# Altium PCB TUD-LoggingPCB.pcbdoc
Units mm, origin at the board's own origin, x right, y up, seen from the top; angles counter-clockwise.
Board outline 101.02 x 43.95 mm, 2 copper layers (Top Layer, Bottom Layer); 71 components, 65 nets, 401 pads, 135 vias.
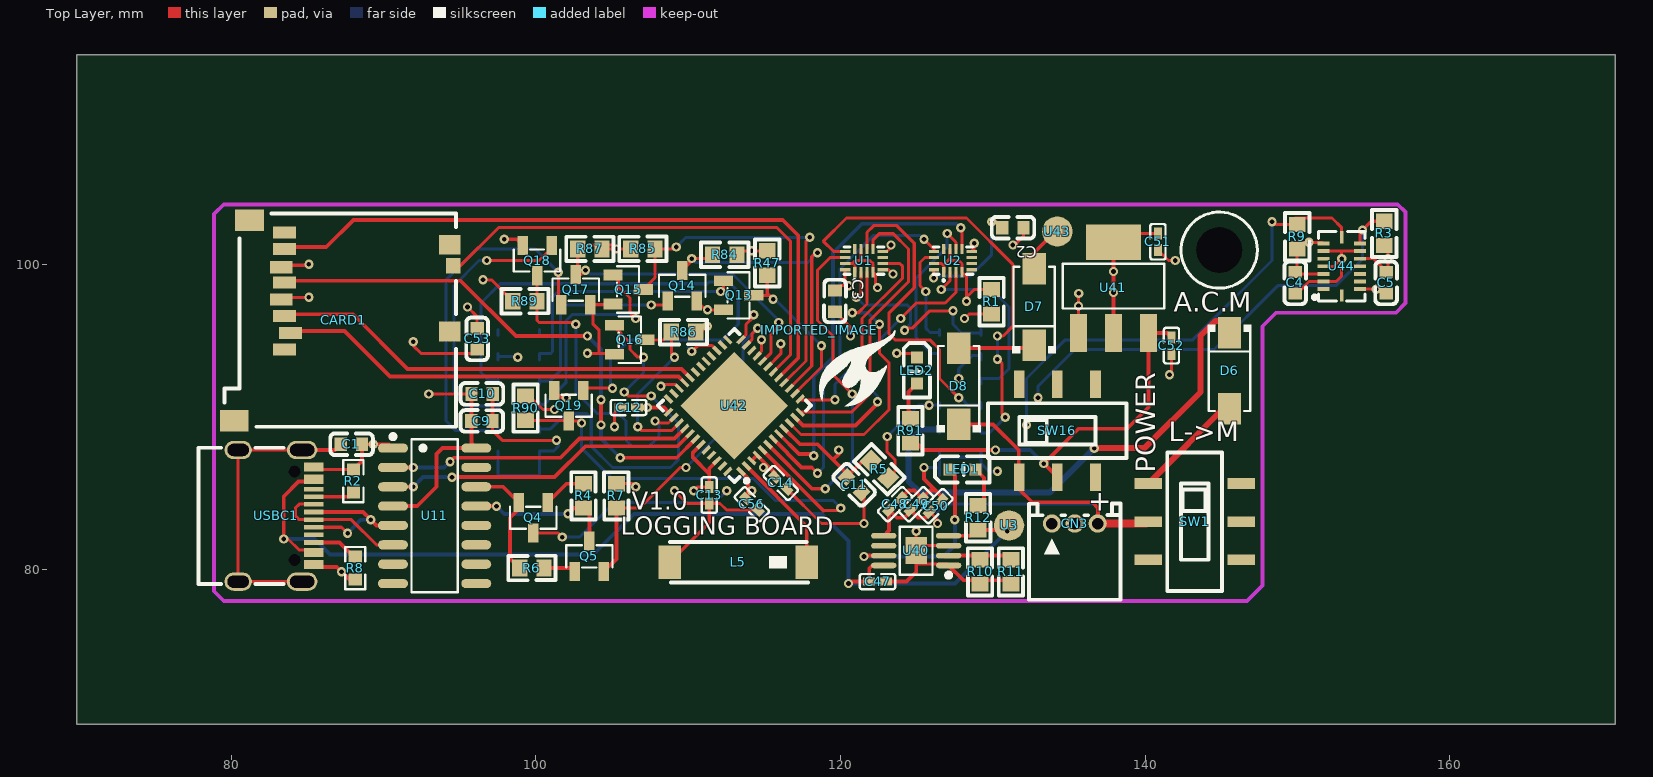
[diagram p0: Top Layer view]
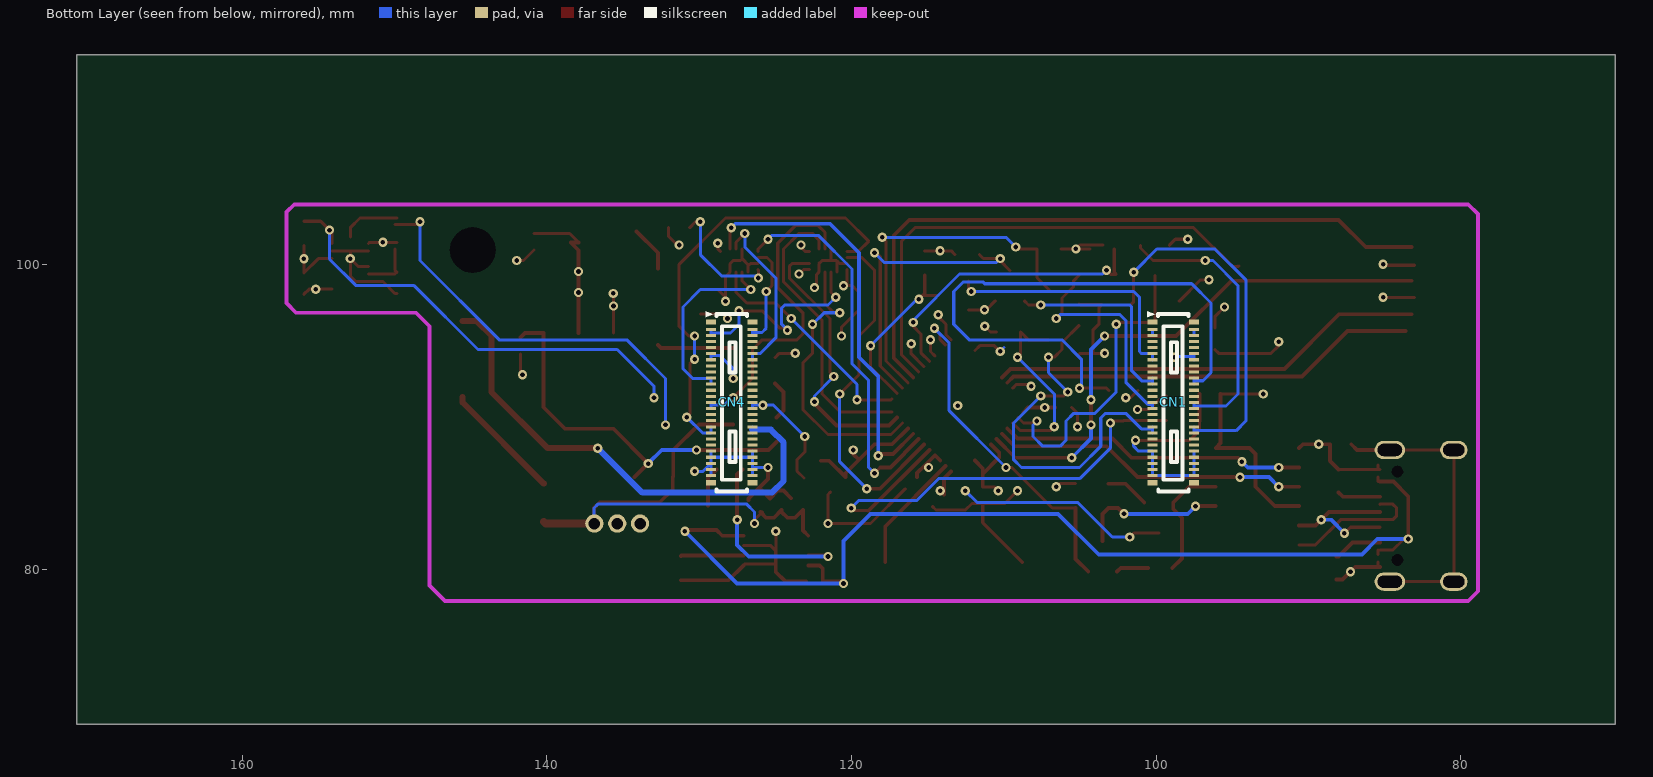
[diagram p1: Bottom Layer view, seen from below]

## Layer stack, top to bottom
Top Layer: signal copper (thickness not stored)
Dielectric: dielectric 0.32, FR-4, Dk 4.8
Bottom Layer: signal copper (thickness not stored)

## Board outline
170.868,69.85 69.85,69.85 69.85,113.799 170.868,113.799
cut-out: 146.367,100.974 ccw(c144.867,100.974) 143.367,100.974 ccw(c144.867,100.974)

## Components (designator, comment, footprint, x,y, rotation, side; value= is the part's Value field where it differs from the comment)
C1 "100nF" C0603 87.884,88.226 r180 top
C2 "100nF" C0603 131.318,102.45 r180 top
C3 "100nF" C0603 119.634,97.624 r270 top
C4 "100nF" C0603 149.86,98.829 r90 top
C5 "100nF" C0603 155.829,98.829 r90 top
C9 "100nF" C0603 96.455,89.75 r0 top
C10 "100nF" C0603 96.458,91.528 r0 top
C11 "100nF" C0603 120.891,85.572 r135 top
C12 "100nF" C0402_NEW 106.082,90.639 r0 top
C13 "100nF" C0402_NEW 111.379,84.887 r90 top
C14 "100nF" C0402_NEW 116.078,85.686 r135 top
C47 "10uF" C0402 122.428,79.209 r180 top
C48 "10uF" C0402 123.575,84.294 r45 top
C49 "10uF" C0402 124.968,84.289 r45 top
C50 "10uF" C0402 126.238,84.162 r45 top
C51 "10uF" C0402 140.843,101.524 r270 top
C52 "10uF" C0402 141.732,94.703 r90 top
C53 "100nF" C0603 96.139,95.149 r90 top
C56 "10uF" C0402 114.178,84.285 r315 top
CARD1 "473521001" SD-SMD_SD-47352-101 87.376,96.354 r90 top
CN1 "DF40C-50DP-0.4V(51)" CONN-SMD_DF40C-50DP-0.4V 98.867,90.974 r270 bottom
CN3 "X1502WR-03K-N0SN" CONN-TH_3P-P1.50_X1502WR-03K-N0SN 135.382,83.019 r0 top
CN4 "DF40C-50DP-0.4V(51)" CONN-SMD_DF40C-50DP-0.4V 127.867,90.974 r270 bottom
D6 "SS54" SMA_L4.4-W2.8-LS5.4-R-RD 145.542,93.052 r270 top
D7 "SS54" SMA_L4.4-W2.8-LS5.4-R-RD 132.715,97.243 r90 top
D8 "SS54" SMA_L4.4-W2.8-LS5.4-R-RD 127.762,92.036 r90 top
IMPORTED_IMAGE "IMPORTED_IMAGE" IMPORTED_IMAGE 118.618,95.719 r0 top
L5 "SLDA92-2R660G-S1TF" ANT-SMD_L9.00-W2.00 113.284,80.479 r180 top
LED1 "KT-0603R" LED0603-R-RD 128.016,86.575 r0 top
LED2 "KT-0603R" LED0603-R-RD 125.018,93.066 r270 top
Q4 "SS8050_C2150" SOT-23-3_L2.9-W1.3-P1.90-LS2.4-BR 99.822,83.4 r90 top
Q5 "SS8050_C2150" SOT-23-3_L2.9-W1.3-P1.90-LS2.4-BR 103.505,80.86 r270 top
Q13 "SI2302" SOT-23-3_L2.9-W1.3-P1.90-LS2.4-BR 113.3,98.005 r180 top
Q14 "SI2302" SOT-23-3_L2.9-W1.3-P1.90-LS2.4-BR 109.601,98.64 r270 top
Q15 "SI2302" SOT-23-3_L2.9-W1.3-P1.90-LS2.4-BR 106.045,98.386 r180 top
Q16 "SI2302" SOT-23-3_L2.9-W1.3-P1.90-LS2.4-BR 106.172,95.084 r180 top
Q17 "SI2302" SOT-23-3_L2.9-W1.3-P1.90-LS2.4-BR 102.616,98.386 r270 top
Q18 "SI2302" SOT-23-3_L2.9-W1.3-P1.90-LS2.4-BR 100.076,100.291 r90 top
Q19 "SI2302" SOT-23-3_L2.9-W1.3-P1.90-LS2.4-BR 102.147,90.755 r90 top
R1 "10K" R0603#1 129.921,97.586 r90 top
R2 "0603WAF5101T5E" R0603#2 88.011,85.813 r270 top
R3 "10K" R0603#1 155.702,102.069 r270 top
R4 "10K" R0603#1 103.124,84.835 r90 top
R5 "10K" R0603#1 122.555,86.575 r315 top
R6 "10K" R0603#1 99.733,80.098 r0 top
R7 "10K" R0603#1 105.283,84.835 r90 top
R8 "0603WAF5101T5E" R0603#2 88.138,80.098 r270 top
R9 "10K" R0603#1 149.987,101.853 r270 top
R10 "10K" R0603#1 129.159,79.844 r90 top
R11 "10K" R0603#1 131.191,79.844 r90 top
R12 "1kΩ" R0603#1 129.032,83.4 r270 top
R47 "10K" R0603#1 115.189,100.126 r270 top
R84 "10K" R0603#1 112.395,100.672 r180 top
R85 "10K" R0603#1 107.023,101.053 r0 top
R86 "10K" R0603#1 109.69,95.592 r180 top
R87 "10K" R0603#1 103.543,101.053 r180 top
R89 "10K" R0603#1 99.276,97.624 r0 top
R90 "10K" R0603#1 99.314,90.601 r270 top
R91 "1kΩ" R0603#1 124.587,89.115 r270 top
SW1 "SS-3235S-L1" SW-SMD_SS-3235S-LX 143.256,83.146 r90 top
SW16 "SS-3235S-L1" SW-SMD_SS-3235S-LX 134.239,89.115 r180 top
U1 "TMUX1511RSVR" UTQFN-16_L2.6-W1.8-P0.40-BL 121.539,100.291 r0 top
U2 "TMUX1511RSVR" UTQFN-16_L2.6-W1.8-P0.40-BL 127.381,100.291 r0 top
U3 "SMD_PAD" SMD_PAD 131.064,82.892 r0 top
U11 "CH340B" SOIC-16_L9.9-W3.9-P1.27-LS6.0-BL 93.345,83.527 r270 top
U40 "TP4056M" MSOP-8_L3.0-W3.0-P0.65-LS5.0-BL-EP 124.968,81.241 r90 top
U41 "AMS1117-3.3" SOT-223-3_L6.5-W3.4-P2.30-LS7.0-BR 137.922,98.513 r270 top
U42 "ESP32-PICO-V3" LGA-48_L7.0-W7.0-P0.50-BL-EP5.0 113.03,90.766 r45 top
U43 "SMD_PAD" SMD_PAD 134.239,102.196 r0 top
U44 "BMI055" LGA-16_L4.5-W3.0-P0.50-BL 152.908,99.91 r0 top
USBC1 "TYPE-C-31-M-12" USB-C_SMD-TYPE-C-31-M-12 82.931,83.527 r270 top

## Footprints (in the part's own frame and the unit in brackets; to place one, negate y for a bottom-side part, rotate by r counter-clockwise, add the part's x,y. Pads: shape width x height; smd on the part's side, far side on the other; paste and mask are expansions set on the pad)
ANT-SMD_L9.00-W2.00 [mm]
  rect 1.5x2.2 smd paste+0 mask+0.051: 1(-4.5,0) 2(4.5,0)
  silkscreen extent -4.57,-1.33 4.5,1.33
C0402 [mm]
  rect 0.79x0.54 smd paste-100 mask+0.051: 1(-0.545,0) 2(0.545,0)
  silkscreen extent -1.17,-0.5 1.17,0.5
C0402_NEW [mm]
  rect 0.79x0.54 smd paste-100 mask+0.051: 1(-0.545,0) 2(0.545,0)
  silkscreen extent -1.17,-0.5 1.17,0.5
C0603 [mm]
  rect 0.8x0.9 smd paste+0 mask+0.051: 1(-0.7,0) 2(0.7,0)
  silkscreen extent -1.41,-0.71 1.39,0.72
CONN-SMD_DF40C-50DP-0.4V [mm]
  rect 0.2x0.66 smd paste+0 mask+0.051: 1(-4.8,-1.355) 2(-4.8,1.355) 3(-4.4,-1.355) 4(-4.4,1.355) 5(-4,-1.355) 6(-4,1.355) 7(-3.6,-1.355) 8(-3.6,1.355) 9(-3.2,-1.355) 10(-3.2,1.355) 11(-2.8,-1.355) 12(-2.8,1.355) 13(-2.4,-1.355) 14(-2.4,1.355) 15(-2,-1.355) 16(-2,1.355) 17(-1.6,-1.355) 18(-1.6,1.355) 19(-1.2,-1.355) 20(-1.2,1.355) 21(-0.8,-1.355) 22(-0.8,1.355) 23(-0.4,-1.355) 24(-0.4,1.355) 25(0,-1.355) 26(0,1.355) 27(0.4,-1.355) 28(0.4,1.355) 29(0.8,-1.355) 30(0.8,1.355) 31(1.2,-1.355) 32(1.2,1.355) 33(1.6,-1.355) 34(1.6,1.355) 35(2,-1.355) 36(2,1.355) 37(2.4,-1.355) 38(2.4,1.355) 39(2.8,-1.355) 40(2.8,1.355) 41(3.2,-1.355) 42(3.2,1.355) 43(3.6,-1.355) 44(3.6,1.355) 45(4,-1.355) 46(4,1.355) 47(4.4,-1.355) 48(4.4,1.355) 49(4.8,-1.355) 50(4.8,1.355)
  rect 0.35x0.66 smd paste+0 mask+0.051: 51(5.275,1.355) 52(5.275,-1.355) 53(-5.275,1.355) 54(-5.275,-1.355)
  silkscreen extent -6,-1.7 5.84,1.02
CONN-TH_3P-P1.50_X1502WR-03K-N0SN [mm]
  round 1.2 hole 0.75 paste+0 mask+0.051: 1(-1.5,0) 2(0,0) 3(1.5,0)
  silkscreen extent -3,-5 3,1.31
IMPORTED_IMAGE [mm]
  silkscreen extent 0,-5 5,0
LED0603-R-RD [mm]
  rect 0.8x0.8 smd paste+0 mask+0.051: 1(0.851,0) 2(-0.851,0)
  silkscreen extent -1.82,-0.86 1.77,0.86
LGA-16_L4.5-W3.0-P0.50-BL [mm]
  rect 0.8x0.25 smd paste+0 mask+0.051: 1(-1.2,-1.498) 2(-1.2,-0.998) 3(-1.2,-0.498) 4(-1.2,0.002) 5(-1.2,0.502) 6(-1.2,1.002) 7(-1.2,1.502) 9(1.2,1.502) 10(1.2,1.002) 11(1.2,0.502) 12(1.2,0.002) 13(1.2,-0.498) 14(1.2,-0.998) 15(1.2,-1.498)
  rect 0.25x0.8 smd paste+0 mask+0.051: 8(0,1.915) 16(0,-1.915)
  silkscreen extent -1.89,-2.29 1.52,2.29
LGA-48_L7.0-W7.0-P0.50-BL-EP5.0 [mm]
  rect 0.25x0.68 smd paste+0 mask+0.051: 1(-2.75,-3.365) 2(-2.25,-3.365) 3(-1.75,-3.365) 4(-1.25,-3.365) 5(-0.75,-3.365) 6(-0.25,-3.365) 7(0.25,-3.365) 8(0.75,-3.365) 9(1.25,-3.365) 10(1.75,-3.365) 11(2.25,-3.365) 12(2.75,-3.365) 25(2.75,3.365) 26(2.25,3.365) 27(1.75,3.365) 28(1.25,3.365) 29(0.75,3.365) 30(0.25,3.365) 31(-0.25,3.365) 32(-0.75,3.365) 33(-1.25,3.365) 34(-1.75,3.365) 35(-2.25,3.365) 36(-2.75,3.365)
  rect 0.68x0.25 smd paste+0 mask+0.051: 13(3.365,-2.75) 14(3.365,-2.25) 15(3.365,-1.75) 16(3.365,-1.25) 17(3.365,-0.75) 18(3.365,-0.25) 19(3.365,0.25) 20(3.365,0.75) 21(3.365,1.25) 22(3.365,1.75) 23(3.365,2.25) 24(3.365,2.75) 37(-3.365,2.75) 38(-3.365,2.25) 39(-3.365,1.75) 40(-3.365,1.25) 41(-3.365,0.75) 42(-3.365,0.25) 43(-3.365,-0.25) 44(-3.365,-0.75) 45(-3.365,-1.25) 46(-3.365,-1.75) 47(-3.365,-2.25) 48(-3.365,-2.75)
  rect 5x5 smd paste+0 mask+0.051: 49(0,0)
  silkscreen extent -3.56,-4.19 3.56,3.56
MSOP-8_L3.0-W3.0-P0.65-LS5.0-BL-EP [mm]
  oval 0.364x1.662 smd paste+0 mask+0.051: 1(-0.975,-2.131) 2(-0.325,-2.131) 3(0.325,-2.131) 4(0.975,-2.131) 5(0.975,2.131) 6(0.325,2.131) 7(-0.325,2.131) 8(-0.975,2.131)
  rect 1.76x1.425 smd paste+0 mask+0.051: 9(0,0)
  silkscreen extent -1.76,-2.28 1.58,1.07
R0603#1 [mm]
  rect 1x1.1 smd paste+0 mask+0.051: 1(-0.8,0) 2(0.8,0)
  silkscreen extent -1.55,-0.8 1.55,0.81
R0603#2 [mm]
  rect 0.806x0.864 smd paste-100 mask+0.051: 1(-0.753,0) 2(0.753,0)
  silkscreen extent -1.39,-0.66 1.39,0.66
SD-SMD_SD-47352-101 [mil]
  rect 31.5x59.1 smd paste+0 mask+2: 1(-75.35,153.5) 2(-32.05,137.7) 3(11.25,153.5) 4(54.55,161.3) 5(97.85,153.5) 6(137.79,161.42) 7(184.45,153.5)
  rect 31.5x59.05 smd paste+0 mask+2: 8(227.75,153.45)
  rect 39.37x37.4 smd paste+0 mask+2: 9(141.2,-282.95)
  rect 55.1x74.8 smd paste+0 mask+2: EH(-258.85,282.95) EH(258.85,243.65)
  rect 51.18x55.12 smd paste+0 mask+2: EH(-28.5,-274.1) EH(195.9,-274.1)
  silkscreen extent -275,-290 277,309
SMA_L4.4-W2.8-LS5.4-R-RD [mm]
  rect 2.063x1.539 smd paste+0 mask+0.051: 1(2.504,0) 2(-2.504,0)
  silkscreen extent -3.03,-1.43 2.65,1.43
SMD_PAD [mm]
  round 2 smd mask+0.051: 1(0,0)
SOIC-16_L9.9-W3.9-P1.27-LS6.0-BL [mm]
  oval 0.602x1.971 smd paste+0 mask+0.051: 1(-4.445,-2.736) 2(-3.175,-2.736) 3(-1.905,-2.736) 4(-0.635,-2.736) 5(0.635,-2.736) 6(1.905,-2.736) 7(3.175,-2.736) 8(4.445,-2.736) 9(4.445,2.736) 10(3.175,2.736) 11(1.905,2.736) 12(0.635,2.736) 13(-0.635,2.736) 14(-1.905,2.736) 15(-3.175,2.736) 16(-4.445,2.736)
  silkscreen extent -5.35,-2.89 5.03,1.52
SOT-23-3_L2.9-W1.3-P1.90-LS2.4-BR [mm]
  rect 1.25x0.7 smd paste+0 mask+0.051: 1(1,-0.95) 2(1,0.95) 3(-1,0)
  silkscreen extent -0.73,-1.53 0.73,1.53
SOT-223-3_L6.5-W3.4-P2.30-LS7.0-BR [mm]
  rect 2.5x1.1 smd paste+0 mask+0.051: 1(2.97,-2.3) 2(2.97,0) 3(2.97,2.3)
  rect 2.34x3.6 smd paste+0 mask+0.051: 4(-2.97,0)
  silkscreen extent -1.57,-3.33 1.37,3.33
SW-SMD_SS-3235S-LX [mm]
  rect 0.7x1.8 smd paste+0 mask+0.051: 1(-2.5,3.05) 2(0,3.05) 3(2.5,3.05) 4(-2.5,-3.05) 5(0,-3.05) 6(2.5,-3.05)
  silkscreen extent -4.55,-1.8 4.55,1.8
USB-C_SMD-TYPE-C-31-M-12 [mm]
  oval 1.2x2 hole 0.8 slot 1.6 at 90 deg paste+0 mask+0.051: 0(-4.325,1.716) 1(4.325,1.716)
  oval 1.2x1.8 hole 0.8 slot 1.4 at 90 deg paste+0 mask+0.051: 2(4.325,-2.484) 3(-4.325,-2.484)
  rect 0.3x1.3 smd paste-100 mask+0.051: A1(-3.35,2.484) A4(-2.55,2.484) A5(-1.25,2.484) A6(-0.25,2.484) A7(0.25,2.484) A8(1.25,2.484) A9(2.55,2.484) A12(3.35,2.484) B1(3.05,2.484) B4(2.25,2.484) B5(1.75,2.484) B6(0.75,2.484) B7(-0.75,2.484) B8(-1.75,2.484) B9(-2.25,2.484) B12(-3.05,2.484)
  Multi-Layer board cut-out: -2.9,1.591 -3.063,1.554 -3.193,1.449 -3.266,1.299 -3.266,1.132 -3.193,0.982 -3.063,0.878 -2.9,0.841 -2.9,0.841 -2.737,0.878 -2.607,0.982 -2.534,1.132 -2.534,1.299 -2.607,1.449 -2.737,1.554 -2.9,1.591
  Multi-Layer board cut-out: 2.9,1.591 2.737,1.554 2.607,1.449 2.534,1.299 2.534,1.132 2.607,0.982 2.737,0.878 2.9,0.841 2.9,0.841 3.063,0.878 3.193,0.982 3.266,1.132 3.266,1.299 3.193,1.449 3.063,1.554 2.9,1.591
  silkscreen extent -4.47,-5.08 4.47,0.5
UTQFN-16_L2.6-W1.8-P0.40-BL [mm]
  rect 0.21x0.665 smd paste+0 mask+0.051: 1(-0.6,-0.768) 2(-0.2,-0.768) 3(0.2,-0.768) 4(0.6,-0.768) 9(0.6,0.768) 10(0.2,0.768) 11(-0.2,0.768) 12(-0.6,0.768)
  rect 0.665x0.21 smd paste+0 mask+0.051: 5(1.232,-0.6) 6(1.232,-0.2) 7(1.232,0.2) 8(1.232,0.6) 13(-1.232,0.6) 14(-1.232,0.2) 15(-1.232,-0.2) 16(-1.232,-0.6)
  silkscreen extent -1.3,-1.38 1.3,0.9

## Via types
v1: diameter 0.61, hole 0.305, Top Layer to Bottom Layer, 135 vias

## Nets (pads, with @x,y where several pads share a name; then routed paths per layer and width w, separated by ;. In a path a pad name is that pad's centre, name@x,y a point inside that pad or via, vN(x,y) a via of type N, cw(c..) or ccw(c..) an arc to the next point about the centre after c; other vN are vias at no path point)
2.4GHZ: L5.1 U42.2 | length 8
  Top Layer w0.254: U42.2 117.784,82.83 L5.1
$1N6205: Q5.1 R6.2 | length 2.1
  Top Layer w0.254: R6.2 102.317,80.098 Q5.1
$1N6206: Q4.1 R4.2 | length 2.9
  Top Layer w0.254: Q4.1 102.007,85.635 R4.2
$1N6214: R10.2 R11.2 U40.2 | length 4.1
  Top Layer w0.254: U40.2 131.173,80.916 R11.2@131.191,80.898
$1N6218: LED1.2 U40.7 | length 12.7
  Top Layer w0.254: v1(121.539,80.86) 121.595,80.916 U40.7 ; LED1.2 127.508,86.232 v1(127.508,83.273)
  Bottom Layer w0.254: v1(121.539,80.86) 126.746,80.86 127.508,81.622 v1(127.508,83.273)
$1N6220: LED1.1 R12.1 | length 2.6
  Top Layer w0.254: LED1.1 129.413,86.029 R12.1@129.413,84.2
$1N6298: LED2.1 R91.1 | length 2.7
  Top Layer w0.254: R91.1@124.918,89.981 124.46,90.439 124.46,91.657 LED2.1
$1N13661: D7.2 D8.1 | length 5
  Top Layer w0.254: D8.1 132.515,94.54 D7.2
$1N18186: D6.1 SW1.3 | length 7.9
  Top Layer w0.4: SW1.3 145.542,90.982 D6.1@145.542,91.31
$1N21355: R2.2 USBC1.A5 | length 2.8
  Top Layer w0.254: USBC1.A5@85.288,84.777 87.728,84.777 R2.2
$1N21357: R8.1 USBC1.B5 | length 3.2
  Top Layer w0.254: USBC1.B5@85.288,81.777 87.094,81.777 88.02,80.851 R8.1
$1N23399: D7.1 U43.1 | length 3
  Top Layer w0.254: D7.1 132.715,100.799 U43.1@134.112,102.196
APO_BUTT_1: CN1.9 CN1.11 Q13.1 | length 16.9
  Top Layer w0.2: v1(112.141,98.259) 112.3,98.418 Q13.1
  Bottom Layer w0.2: CN1.11 CN1.9 100.944,94.174 101.092,94.322 101.092,97.878 101.473,98.259 v1(112.141,98.259)
APO_BUTT_2: CN1.17 CN1.19 Q14.1 | length 13.5
  Top Layer w0.2: v1(107.569,97.37) 108.381,97.37 Q14.1
  Bottom Layer w0.2: CN1.19 100.222,92.392 ; CN1.17 100.222,92.392 ; v1(107.569,97.37) 101.727,97.37 101.6,97.243 101.6,93.052 100.94,92.392 100.222,92.392
APO_BUTT_3: CN1.25 CN1.27 Q15.1 | length 15.1
  Top Layer w0.2: Q15.1 105.41,98.971 105.41,98.586 106.172,97.824 106.172,96.862 v1(106.553,96.481)
  Bottom Layer w0.2: CN1.27 100.222,90.848 ; CN1.25 100.222,90.848 ; v1(106.553,96.481) 106.299,96.735 102.362,96.735 101.981,96.354 101.981,92.29 100.539,90.848 100.222,90.848
APO_BUTT_4: CN1.33 CN1.35 Q16.1 | length 25.5
  Top Layer w0.2: Q16.1@105.045,96.034 106.172,94.907 106.172,94.449 106.68,93.941 v1(107.061,93.941) ; v1(105.791,91.655) 106.045,91.401 v1(107.569,91.401)
  Bottom Layer w0.2: CN1.35 100.222,89.217 ; CN1.33 100.222,89.217 ; v1(105.791,91.655) 107.061,92.925 v1(107.061,93.941) ; v1(107.569,91.401) 109.347,89.623 109.347,87.21 108.839,86.702 105.029,86.702 103.632,88.099 103.632,89.95 103.324,90.258 101.981,90.258 100.965,89.242 100.247,89.242 100.222,89.217
APO_BUTT_5: CN1.34 CN1.36 Q17.1 | length 24.4
  Top Layer w0.2: v1(101.473,99.529) 101.473,97.579 Q17.1
  Bottom Layer w0.2: CN1.36 97.512,89.119 ; CN1.34 97.512,89.119 ; v1(101.473,99.529) 99.949,101.053 96.139,101.053 94.107,99.021 94.107,89.75 94.738,89.119 97.512,89.119
APO_BUTT_6: CN1.26 CN1.28 Q18.1 | length 18.3
  Top Layer w0.2: v1(96.774,100.291) 100.203,100.291 101.026,101.114 Q18.1
  Bottom Layer w0.2: v1(96.774,100.291) 96.266,100.291 94.615,98.64 94.615,91.528 95.402,90.741 97.512,90.741 ; CN1.28 97.512,90.741 ; CN1.26 97.512,90.741
APO_BUTT_7: CN1.18 CN1.20 Q19.1 | length 39.5
  Top Layer w0.2: Q19.1 103.251,91.909 v1(105.029,91.909)
  Bottom Layer w0.2: CN1.20 97.512,92.396 ; CN1.18 97.512,92.396 ; v1(105.029,91.909) 104.902,92.036 104.902,93.814 106.172,95.084 112.268,95.084 113.284,96.1 113.284,98.259 112.649,98.894 111.379,98.894 111.252,98.767 97.663,98.767 96.393,97.497 96.393,92.925 96.922,92.396 97.512,92.396
APO_JOY_1: CN4.2 CN4.4 U2.14 | length 7
  Top Layer w0.2: v1(125.603,98.259) 125.222,98.64 125.222,100.164 125.549,100.491 U2.14
  Bottom Layer w0.2: v1(125.603,98.259) 125.603,95.846 125.881,95.568 126.512,95.568 ; CN4.4 126.512,95.568 ; CN4.2 126.512,95.568
APO_JOY_2: CN4.10 CN4.12 U2.10 | length 11.3
  Top Layer w0.2: v1(127,102.069) 127.581,101.488 U2.10
  Bottom Layer w0.2: CN4.12 CN4.10 126.005,94.174 124.968,95.211 124.968,99.148 127,101.18 v1(127,102.069)
APO_STOR_V_PRE: CN4.33 CN4.35 U1.13 | length 29.4
  Top Layer w0.2: U1.13 119.542,100.891 118.872,101.561 120.396,103.085 128.27,103.085 131.318,100.037 131.318,95.973 130.683,95.338 v1(130.302,95.338) ; v1(130.302,93.814) 130.61,93.506 130.61,90.204 v1(130.81,90.004)
  Bottom Layer w0.2: CN4.33 CN4.35 129.78,88.974 v1(130.81,90.004) ; v1(130.302,93.814) v1(130.302,95.338)
CRANK2_CURR_SENSE: CN4.25 CN4.27 U1.10 | length 21
  Top Layer w0.2: U1.10 121.739,102.142 122.174,102.577 123.698,102.577 124.841,101.434 124.841,98.513 123.19,96.862 123.19,95.465 123.571,95.084 125.857,95.084 126.492,94.449 126.492,92.544 v1(127.762,91.274)
  Bottom Layer w0.2: v1(127.762,91.274) 127.889,91.274 128.369,90.794 129.222,90.794 ; CN4.27 129.222,90.794 ; CN4.25 129.222,90.794
CRANK_CURR_SENSE: CN4.9 CN4.11 U1.5 | length 12.3
  Top Layer w0.2: U1.5 123.155,99.691 v1(123.444,99.402)
  Inner2 w0.2: v1(123.444,99.402) 123.825,99.021 123.825,98.386 125.476,96.735 125.476,94.83 v1(127.762,92.544)
  Bottom Layer w0.2: v1(127.762,92.544) 127.762,93.179 128.627,94.044 129.222,94.044 ; CN4.11 129.222,94.044 ; CN4.9 129.222,94.044
ESP_3V3: C2.2 C3.1 C4.2 C5.2 C9.1 C10.1 C12.2 C13.2 C14.2 C51.1 C53.2 C56.1 CARD1.4 CN4.26 CN4.28 R3.2 R5.2 R7.2 R9.2 R47.1 R84.1 R85.1 R86.1 R87.1 R89.1 R90.1 U1.16 U2.16 U11.4 U11.16 U41.2 U41.4 U42.1 U42.3 U42.4 U42.19 U42.37 U42.43 U42.46 U44.3 U44.7 U44.11 | length 90.5
  Top Layer w0.2: CARD1.4@83.025,97.867 85.079,97.867 v1(85.09,97.878) ; v1(92.964,91.528) C10.1 ; v1(95.504,97.243) 96.139,96.608 C53.2 ; v1(96.52,99.021) 97.079,99.021 R89.1 ; R90.1 99.568,91.401 100.457,90.512 v1(101.219,90.512) ; 103.495,101.307 105.007,101.307 v1(105.261,101.053) ; R87.1 v1(105.261,101.053) ; R7.2 106.35,85.635 v1(106.553,85.432) ; R85.1 v1(105.261,101.053) ; v1(110.363,85.178) 110.617,85.432 C13.2 ; R86.1 110.871,95.592 v1(111.252,95.973) ; R84.1 113.449,100.926 v1(114.18,100.926) R47.1 ; C56.1@113.919,84.924 v1(114.173,85.178) ; U42.19 116.078,94.168 v1(116.078,94.83) ; C3.1 119.95,98.64 v1@120.402,98.64 ; U1.16 120.307,98.735 v1@120.402,98.64 ; v1(120.523,98.64) v1@120.402,98.64 ; v1(123.063,88.734) 123.063,87.718 123.571,87.21 123.571,86.46 R5.2 ; v1(126.111,99.148) 126.111,99.653 U2.16 ; v1(129.921,102.831) 130.237,102.831 C2.2 ; U41.4 138.508,102.069 C51.1 ; R9.2@149.86,101.485 v1(150.767,101.485) 151.635,101.485 U44.7 ; R9.2 149.987,99.656 C4.2 149.987,99.402 151.698,99.402 U44.3 ; U44.11 155.011,100.412 155.956,99.467 v1(155.956,100.408) R3.2@155.956,101.269
  Top Layer w0.254: U11.4 92.202,84.162 93.472,85.432 93.472,87.591 93.853,87.972 U11.16 95.755,88.297 C9.1 95.758,89.753 C10.1 ; C12.2 v1(107.315,90.639) 108.398,90.639 U42.37 ; U42.43 110.3,87.682 110.3,87.36 111.379,86.281 ; C13.2 111.379,86.281 ; U42.46 111.379,86.64 111.379,86.281 ; U42.1 113.919,85.988 C56.1@113.919,84.924 ; U42.3 U42.4 v1@115.188,86.84 ; v1(114.935,86.702) 115.05,86.702 v1@115.188,86.84 ; C14.2 115.693,86.336 v1@115.188,86.84 ; U41.2 v1(137.922,98.195) v1(137.922,99.571) 137.922,100.968 138.437,101.483 U41.4
  Inner2 w0.2: 111.125,86.067 111.125,85.178 112.014,84.289 113.284,84.289 v1(114.173,85.178) ; v1(116.078,94.83) 116.078,92.28 116.2,92.158
  Bottom Layer w0.2: v1(123.063,88.734) 125.123,90.794 v1(125.815,90.794) 126.512,90.794 ; v1(126.111,99.148) 126.238,99.275 128.524,99.275 129.921,100.672 v1(129.921,102.831) ; CN4.28 126.512,90.794 ; CN4.26 126.512,90.794
ESP_5V: C47.2 R12.2 U3.1 U40.4 U40.8 USBC1.A4 USBC1.A9 USBC1.B4 USBC1.B9 | length 69.1
  Top Layer w0.2: v1(83.439,82.003) 83.722,82.003 84.448,81.277 USBC1.B4@85.288,81.277 ; USBC1.A9 USBC1.B4 ; USBC1.B9 USBC1.A4
  Top Layer w0.254: v1(83.439,82.003) 83.439,84.797 84.419,85.777 USBC1.B9@85.288,85.777 ; v1(120.523,79.082) 120.65,79.209 C47.2 121.883,80.061 122.088,80.266 U40.8 ; U40.4 128.483,82.216 128.867,82.6 130.848,82.6 v1(130.937,82.511)
  Bottom Layer w0.254: v1(83.439,82.003) 85.471,82.003 86.487,80.987 103.759,80.987 106.426,83.654 118.745,83.654 120.523,81.876 v1(120.523,79.082) 127.508,79.082 v1(130.937,82.511)
ESP_BUTT_1: Q13.3 R47.2 U42.14 | length 11.1
  Top Layer w0.2: Q13.3 115.316,98.005 ; R47.2 115.189,98.132 115.316,98.005 ; v1(115.57,97.751) 115.316,98.005 ; U42.14 118.745,93.299 v1(118.745,94.703)
  Bottom Layer w0.2: v1(115.57,97.751) 115.697,97.751 v1(118.745,94.703)
ESP_BUTT_2: Q14.3 R84.2 U42.15 | length 20.9
  Top Layer w0.2: Q14.3 110.236,100.275 v1(110.236,100.418) 111.341,100.418 R84.2 ; U42.15 118.11,93.371 118.11,100.545 118.364,100.799 v1(118.491,100.799)
  Bottom Layer w0.2: v1(110.236,100.418) 110.49,100.164 117.856,100.164 v1(118.491,100.799)
ESP_BUTT_3: Q15.3 R85.2 U42.16 | length 23.7
  Top Layer w0.2: Q15.3 107.823,99.164 R85.2 109.093,101.053 v1(109.22,101.18) ; U42.16 117.729,93.697 117.729,101.561 v1(117.983,101.815)
  Bottom Layer w0.2: v1(109.22,101.18) 109.855,101.815 v1(117.983,101.815)
ESP_BUTT_4: Q16.3 R86.2 U42.39 | length 12.4
  Top Layer w0.2: v1(106.68,89.369) 106.934,89.115 108.904,89.115 U42.39 ; Q16.3@107.045,95.084 108.382,95.084 R86.2 108.89,94.144 v1(109.093,93.941)
  Bottom Layer w0.2: v1(106.68,89.369) 106.68,91.528 v1(109.093,93.941)
ESP_BUTT_5: Q17.3 R87.2 U42.20 | length 19.7
  Top Layer w0.2: R87.2 102.743,99.513 Q17.3 102.981,99.386 v1(103.251,99.656) ; U42.20 115.443,94.24 115.443,95.465 115.951,95.973 v1(115.951,96.227)
  Bottom Layer w0.2: v1(103.251,99.656) 103.505,99.402 112.903,99.402 115.951,96.354 v1(115.951,96.227)
ESP_BUTT_6: Q18.3 R89.2 U42.38 | length 20.5
  Top Layer w0.2: Q18.3 R89.2 100.076,96.354 100.203,96.227 102.489,96.227 v1(102.616,96.1) ; v1(107.823,89.75) 107.95,89.623 108.705,89.623 U42.38
  Bottom Layer w0.2: v1(102.616,96.1) 102.616,91.655 104.013,90.258 105.41,90.258 105.918,89.75 105.918,88.48 106.299,88.099 107.442,88.099 108.077,88.734 108.077,89.496 v1(107.823,89.75)
ESP_BUTT_7: Q19.3 R90.2 U42.5 | length 30.9
  Top Layer w0.2: R90.2 102.101,89.801 Q19.3 102.865,89.755 v1(102.997,89.623) ; 118.872,83.863 119.843,83.863 v1(120.015,84.035)
  Top Layer w0.254: U42.5 118.872,83.863
  Bottom Layer w0.2: v1(102.997,89.623) 102.997,87.972 104.98,85.989 114.251,85.989 115.697,84.543 119.507,84.543 v1(120.015,84.035)
ESP_CRANK2_SENSE: U1.9 U42.12 | length 19.1
  Top Layer w0.2: U42.12 120.723,90.331 121.92,91.528 121.92,96.354 124.46,98.894 124.46,101.053 123.465,102.048 122.534,102.048 122.139,101.653 U1.9
ESP_CRANK_SENSE: U1.6 U42.11 | length 18.1
  Top Layer w0.2: v1(121.158,92.671) 121.412,92.925 121.412,96.481 124.079,99.148 124.079,99.91 123.898,100.091 U1.6
  Top Layer w0.254: U42.11 117.528,89.45 120.985,89.45 v1@122.301,90.766
  Bottom Layer w0.2: v1(121.158,92.671) 122.428,91.401 v1(122.428,91.02)
ESP_D+: U11.5 USBC1.A6 USBC1.B6 | length 10.1
  Top Layer w0.2: USBC1.B6@85.288,82.777 87.237,82.777 v1(87.63,82.384)
  Top Layer w0.254: USBC1.A6@85.288,83.777 86.05,83.777 86.054,83.781 88.646,83.781 v1(89.154,83.273) 89.535,82.892 U11.5
  Bottom Layer w0.254: v1(87.63,82.384) 88.519,83.273 v1(89.154,83.273)
ESP_D-: U11.6 USBC1.A7 USBC1.B7 | length 8.9
  Top Layer w0.2: USBC1.B7@85.288,84.277 85.276,84.289 84.455,84.289 84.201,84.035 84.201,83.527 84.451,83.277 USBC1.A7 87.88,83.277 89.535,81.622 U11.6
ESP_DTR: Q5.3 R4.1 U11.13 | length 9.7
  Top Layer w0.254: U11.13 v1(97.409,84.162) ; v1(102.108,83.654) 102.489,84.035 R4.1 103.505,83.654 Q5.3
  Bottom Layer w0.254: v1(97.409,84.162) 97.917,83.654 v1(102.108,83.654)
ESP_EN: C11.2 Q4.3 R5.1 U42.9 | length 31.4
  Top Layer w0.2: Q4.3 101.457,82.4 v1(101.727,82.13)
  Top Layer w0.254: U42.9 117.338,88.226 118.491,88.226 119.511,87.206 ; v1(119.888,87.845) 119.888,87.582 119.511,87.206 ; R5.1 121.47,87.141 C11.2 120.396,86.321 119.511,87.206
  Inner2 w0.2: v1(112.522,85.178) 115.697,88.353 119.38,88.353 v1(119.888,87.845)
  Bottom Layer w0.2: v1(101.727,82.13) 102.87,82.13 105.156,84.416 111.76,84.416 v1(112.522,85.178)
ESP_IO0: Q5.2 R7.1 U42.23 | length 22.7
  Top Layer w0.2: R7.1 106.807,84.035 109.474,86.702 v1(109.855,86.702) ; U42.23 114.173,95.091 114.173,95.465 v1(114.554,95.846)
  Top Layer w0.254: Q5.2 105.283,80.688 R7.1
  Bottom Layer w0.2: v1(109.855,86.702) 113.587,90.434 113.587,94.879 v1(114.554,95.846)
ESP_ISOLATION: R1.2 U1.1 U1.4 U1.11 U1.15 U2.1 U2.4 U2.11 U2.15 U42.24 | length 34.4
  Top Layer w0.2: U42.24 113.792,95.417 113.792,96.1 114.3,96.608 v1(114.3,96.735) ; U1.15 120.79,100.091 120.939,100.24 ; U1.1 120.939,100.24 ; U1.11 121.339,100.364 121.412,100.291 ; v1(122.428,98.513) 122.301,98.64 122.301,99.361 U1.4 122.139,100.072 121.92,100.291 121.412,100.291 ; U2.15 126.632,100.091 126.686,100.037 126.746,100.037 126.781,100.002 ; U2.1 126.781,100.002 ; U2.11 127.181,100.402 ; v1(128.27,97.624) v1@128.27,97.878 ; R1.2 128.778,98.386 v1@128.27,97.878 ; 120.939,100.24 120.99,100.291 121.412,100.291 ; 126.781,100.002 127.181,100.402 ; 127.181,100.402 127.292,100.291 127.762,100.291 127.981,100.072 U2.4 128.27,99.234 v1@128.27,97.878
  Inner2 w0.2: v1(114.3,96.735) 114.554,96.989 116.84,96.989 119.38,99.529 121.412,99.529 v1(122.428,98.513) 122.428,99.91 122.809,100.291 127.762,100.291 128.27,99.783 v1(128.27,97.624)
ESP_JOY_1: U2.13 U42.7 | length 25.5
  Top Layer w0.2: 118.11,86.702 v1(118.491,86.321) ; v1(125.476,101.688) 126.149,101.015 U2.13
  Top Layer w0.254: U42.7 117.447,86.702 118.11,86.702
  Bottom Layer w0.2: v1(118.491,86.321) 118.872,86.702 118.872,92.417 119.966,93.511 119.966,99.734 122.174,101.942 125.222,101.942 v1(125.476,101.688)
ESP_JOY_2: U2.9 U42.8 | length 27.5
  Top Layer w0.2: v1(127.889,102.45) 127.981,102.358 U2.9
  Top Layer w0.254: U42.8 117.266,87.591 118.11,87.591 v1(118.237,87.464)
  Bottom Layer w0.254: v1(118.237,87.464) 118.237,92.671 119.507,93.941 119.507,100.799 121.412,102.704 127.635,102.704 v1(127.889,102.45)
ESP_PROG_RX: U11.2 U42.40 | length 20.2
  Top Layer w0.254: U11.2 v1(91.948,86.702) ; v1(94.361,87.083) 94.615,87.337 101.6,87.337 102.87,88.607 109.103,88.607 U42.40
  Bottom Layer w0.254: v1(91.948,86.702) 93.98,86.702 v1(94.361,87.083)
ESP_PROG_TX: U11.3 U42.41 | length 21
  Top Layer w0.254: U11.3 v1(91.948,85.432) ; v1(94.488,86.067) 101.219,86.067 103.251,88.099 109.302,88.099 U42.41
  Bottom Layer w0.254: v1(91.948,85.432) 92.583,86.067 v1(94.488,86.067)
ESP_RTS: Q4.2 R6.1 U11.14 | length 8
  Top Layer w0.254: U11.14 97.84,85.432 Q4.2 98.872,83.974 98.298,83.4 98.298,80.733 R6.1
ESP_SCL: R9.1 U42.34 U44.8 | length 58.8
  Top Layer w0.2: v1(108.204,92.036) 108.331,92.163 109.158,92.163 U42.34 ; v1(148.336,102.831) 148.514,102.653 R9.1 ; R9.1@149.86,103.085 152.273,103.085 152.908,102.45 U44.8
  Inner2 w0.2: v1(108.204,92.036) 108.331,91.909 109.474,91.909 112.141,89.242 121.412,89.242 123.317,87.337 124.333,87.337 126.111,89.115 131.826,89.115 v1(132.207,89.496)
  Bottom Layer w0.2: v1(132.207,89.496) 132.207,92.544 134.747,95.084 143.129,95.084 148.336,100.291 v1(148.336,102.831)
ESP_SDA: R3.1 U42.21 U44.9 | length 53.6
  Top Layer w0.2: U42.21 114.808,94.312 v1(114.808,95.084) ; U44.9 154.108,102.126 154.851,102.869 R3.1@155.956,102.869
  Inner2 w0.2: v1(114.808,95.084) 114.808,92.925 117.856,89.877 128.905,89.877 130.302,91.274 v1(132.969,91.274)
  Bottom Layer w0.2: v1(132.969,91.274) 132.969,92.036 135.382,94.449 144.526,94.449 148.717,98.64 152.527,98.64 154.271,100.385 v1(154.271,102.29)
ESP_SOLAR_SENSE: U1.3 U42.10 | length 18.8
  Top Layer w0.2: U42.10 117.41,88.861 121.539,88.861 123.19,90.512 123.19,93.56 122.555,94.195 v1(122.555,96.1) ; v1(120.777,96.862) 121.158,96.862 121.739,97.443 U1.3
  Bottom Layer w0.2: v1(120.777,96.862) 121.793,96.862 v1(122.555,96.1)
ESP_STOR_V: U1.14 U42.6 | length 23.2
  Top Layer w0.2: U1.14 119.326,100.491 118.491,99.656 118.491,96.354 119.507,95.338 119.507,92.798 v1(120.777,91.528)
  Top Layer w0.254: U42.6 118.138,85.305 v1(118.999,85.305)
  Bottom Layer w0.2: v1(118.999,85.305) 120.777,87.083 v1(120.777,91.528)
ESP_TOTAL_SENSE: U2.3 U42.13 | length 15.1
  Top Layer w0.2: U42.13 117.408,91.147 v1(119.634,91.147) ; v1(123.952,96.481) 124.968,97.497 126.873,97.497 127.581,98.205 U2.3
  Bottom Layer w0.2: v1(119.634,91.147) 119.634,92.163 v1(123.952,96.481)
ESP_VBAT: C48.1 C49.1 C50.1 CN3.3 D8.2 SW1.2 SW16.3 U40.5 | length 36.4
  Top Layer w0.2: C50.1 125.916,83.713 126.365,83.264 v1(126.365,83.019)
  Top Layer w0.254: U40.5 123.19,82.569 C48.1 123.698,83.4 124.206,83.4 124.583,83.777 C49.1 125.086,83.4 125.603,83.4 125.916,83.713 C50.1@125.984,83.781 ; D8.2 130.012,89.532 131.699,87.845 131.699,86.105 SW16.3 131.739,85.265 132.588,84.416 136.525,84.416 136.906,84.035 136.906,83.043 CN3.3
  Top Layer w0.5: CN3.3 140.079,83.019 SW1.2
  Bottom Layer w0.2: v1(126.365,83.019) 126.365,83.781 126.873,84.289 136.652,84.289 136.906,84.035 136.906,83.043 CN3.3
ESP_VBAT_ON: C52.2 R91.2 SW16.2 U41.3 | length 25.2
  Top Layer w0.254: R91.2@124.918,88.381 125.454,87.845 v1(130.175,87.845) ; SW16.2@134.239,86.067 v1(133.35,86.956) 135.636,89.242 138.811,89.242 140.222,90.653 U41.3 141.437,95.543 C52.2
  Bottom Layer w0.254: v1(130.175,87.845) 132.461,87.845 v1(133.35,86.956)
GND: C1.1 C2.1 C3.2 C4.1 C5.1 C9.2 C10.2 C11.1 C12.1 C13.1 C14.1 C47.1 C48.2 C49.2 C50.2 C51.2 C52.1 C53.1 C56.2 CARD1.6 CN1.41 CN1.42 CN1.43 CN1.44 CN1.45 CN1.46 CN1.47 CN1.48 CN1.49 CN1.50 CN3.1 CN4.41 CN4.42 CN4.43 CN4.44 CN4.45 CN4.46 CN4.47 CN4.48 CN4.49 CN4.50 L5.2 LED2.2 Q13.2 Q14.2 Q15.2 Q16.2 Q17.2 Q18.2 Q19.2 R1.1 R2.1 R8.2 R10.1 R11.1 U1.8 U2.8 U11.1 U40.1 U40.3 U40.9 U41.1 U42.49 U44.2 U44.4 U44.6 U44.10 U44.15 USBC1.A1 USBC1.A12 USBC1.B1 USBC1.B12 | length 116
  Top Layer w0.2: CARD1.6@83.022,99.981 85.034,99.981 v1(85.09,100.037) ; USBC1.B12@85.288,86.577 USBC1.B12 ; USBC1.A12 USBC1.B1 ; USBC1.A1 USBC1.B12 ; R2.1 88,86.577 USBC1.B12 ; v1(91.948,94.957) 91.948,94.703 92.456,94.195 95.885,94.195 C53.1 ; C9.2 97.155,89.115 97.79,88.48 v1(101.346,88.48) ; v1(97.917,101.688) 98.729,101.688 Q18.2 ; Q19.2 101.678,91.274 v1(101.981,91.274) ; v1(103.378,94.195) 104.146,94.195 ; Q16.2@105.045,94.134 104.984,94.195 104.146,94.195 ; Q15.2 104.995,97.386 Q17.2 103.759,97.193 103.759,96.1 104.146,95.713 104.146,94.195 ; v1(105.156,89.369) 105.156,90.258 C12.1 ; L5.2 111.379,83.074 C13.1 ; v1(109.093,85.178) 109.929,84.342 C13.1 ; Q14.2 111.136,97.055 Q13.2 ; C56.2@114.69,84.153 114.445,83.908 112.522,83.908 112.088,84.342 C13.1 ; C14.1 118.745,83.019 v1(121.539,83.019) 121.539,84.924 C11.1 ; C3.2 120.65,95.908 v1(120.65,95.338) ; U1.8 123.054,100.891 123.33,101.167 123.317,101.18 v1(123.317,101.307) ; v1(123.698,94.195) 124.739,94.195 LED2.2 ; 124.968,80.266 125.054,80.352 127.013,80.352 U40.1 ; v1(124.968,82.511) U40.9 125.293,81.566 U40.3 ; v1(128.143,96.481) 128.448,96.786 R1.1 ; U2.8 128.778,101.056 v1(128.778,101.434) ; v1(131.318,101.307) 131.445,101.307 132.018,101.88 C2.1 ; U41.1 v1(135.622,97.308) 135.622,98.118 v1(135.636,98.132) ; C51.2 141.531,100.291 v1@141.861,100.291 ; v1(141.605,92.798) 141.732,92.925 C52.1 ; C4.1 149.984,98.129 150.767,98.912 U44.2 152.545,98.912 152.908,99.275 v1(152.908,100.418) ; U44.4 152.402,99.912 v1(152.908,100.418) ; U44.6 152.885,100.912 ; U44.15 v1(155.172,98.412) 155.611,98.412 C5.1@155.956,98.067 ; U44.10 152.885,100.912 ; 152.885,100.912 152.908,100.889 v1(152.908,100.418)
  Top Layer w0.254: USBC1.A12@85.288,80.177 86.916,80.177 v1(87.235,79.858) 87.748,79.345 R8.2 ; R2.1 88.584,87.139 C1.1 v1(89.307,88.226) 90.355,88.226 U11.1 ; C9.2 97.158,89.753 C10.2 ; C47.1 124.333,79.209 124.968,79.844 124.968,80.266 U40.9 ; C48.2 124.46,85.178 124.85,85.178 C49.2 125.857,85.178 126.238,85.178 ; v1(125.476,86.702) 125.476,85.94 126.238,85.178 ; C50.2@126.755,84.552 126.755,84.661 126.238,85.178 ; U40.1 128.067,79.298 129.286,79.298 R11.1@131.191,79.298
  Bottom Layer w0.2: CN1.42 CN1.44 CN1.46 CN1.48 CN1.50 CN1.49 CN1.47 CN1.45 CN1.43 CN1.41 101.148,87.774 101.473,88.099 101.473,88.353 v1(101.346,88.48) ; v1(125.476,86.702) 126.384,86.702 CN4.48 ; CN4.50 CN4.48 ; CN4.42 CN4.44 ; CN4.49 CN4.47 CN4.45 ; CN4.41 CN4.43 ; v1(130.302,86.448) 129.748,86.448 CN4.45 ; CN4.48 CN4.46 CN4.44 ; CN4.44 CN4.43 ; CN4.45 CN4.43
  other v1: 113.03,90.766 111.262,97.055 141.986,100.291
LOG_UART: CN1.10 CN1.12 U42.27 | length 16.7
  Top Layer w0.2: v1(110.236,94.322) 110.617,94.703 111.568,94.703 U42.27
  Inner2 w0.2: v1(98.806,93.941) 99.695,93.052 104.013,93.052 105.664,94.703 109.855,94.703 v1(110.236,94.322)
  Bottom Layer w0.2: CN1.12 97.512,93.988 ; CN1.10 97.512,93.988 ; v1(98.806,93.941) 98.759,93.988 97.512,93.988 ; 109.982,94.576 v1(110.236,94.322)
MAIN_STOR: CN4.34 CN4.36 D6.2 | length 33.6
  Top Layer w0.4: v1(136.652,87.972) 139.954,87.972 143.637,91.655 143.637,95.338 144.617,96.318 D6.2@145.542,96.318
  Bottom Layer w0.2: CN4.36 126.512,89.189 CN4.34
  Bottom Layer w0.4: 126.512,89.189 125.296,89.189 124.46,88.353 124.46,85.813 125.222,85.051 133.731,85.051 v1(136.652,87.972)
SD_CD: CARD1.9 U42.18 | length 32.6
  Top Layer w0.2: CARD1.9 94.593,99.91 94.996,99.91 97.536,102.45 115.824,102.45 116.713,101.561 116.713,94.096 U42.18
SD_CS: CARD1.2 U42.33 | length 27.6
  Top Layer w0.254: CARD1.2@83.624,95.667 87.428,95.667 90.424,92.671 109.357,92.671 U42.33
SD_DI: CARD1.3 U42.32 | length 28.6
  Top Layer w0.254: CARD1.3@83.223,96.767 87.979,96.767 91.567,93.179 109.556,93.179 U42.32
SD_DO: CARD1.7 U42.17 | length 45
  Top Layer w0.254: CARD1.7@83.223,101.166 83.237,101.18 86.233,101.18 88.011,102.958 116.205,102.958 117.221,101.942 117.221,93.896 U42.17
SD_SK: CARD1.5 U42.42 | length 36
  Top Layer w0.254: CARD1.5@83.223,98.966 95.051,98.966 98.679,95.338 v1(103.378,95.338) ; v1(104.267,89.496) v1(104.267,91.147) ; v1(105.537,87.337) 109.248,87.337 U42.42
  Bottom Layer w0.254: v1(103.378,95.338) 104.267,94.449 v1(104.267,91.147) ; v1(104.267,89.496) 104.267,88.607 v1(105.537,87.337)
SOLAR_CURR_SENSE: CN4.1 CN4.3 U1.2 | length 14.3
  Top Layer w0.2: v1(121.031,97.878) 121.339,98.186 U1.2 ; v1(124.206,95.719) 124.333,95.846 124.714,95.846 125.857,96.989 v1(127.381,96.989)
  Bottom Layer w0.2: v1(121.031,97.878) 121.539,97.37 124.387,97.37 124.587,97.17 124.587,96.1 v1(124.206,95.719) ; v1(127.381,96.989) 127.381,96.1 127.948,95.533 129.222,95.533 ; CN4.3 129.222,95.533 ; CN4.1 129.222,95.533
TOTAL_CURR_SENSE: CN4.17 CN4.19 U2.2 | length 12.9
  Top Layer w0.2: v1(126.619,98.386) 127.181,98.948 U2.2
  Bottom Layer w0.2: v1(126.619,98.386) 129.921,98.386 131.064,97.243 131.064,93.179 130.429,92.544 129.252,92.544 CN4.17 CN4.19
USB_SH: C1.2 USBC1.0 USBC1.1 USBC1.2 USBC1.3 | length 19.1
  Top Layer w0.2: USBC1.1 USBC1.2 USBC1.3 USBC1.0
  Top Layer w0.254: USBC1.0@85.282,87.852 86.81,87.852 C1.2
"": CARD1.1 CARD1.8 CARD1.EH CN1.1 CN1.2 CN1.3 CN1.4 CN1.5 CN1.6 CN1.7 CN1.8 CN1.13 CN1.14 CN1.15 CN1.16 CN1.21 CN1.22 CN1.23 CN1.24 CN1.29 CN1.30 CN1.31 CN1.32 CN1.37 CN1.38 CN1.39 CN1.40 CN1.51 CN1.52 CN1.53 CN1.54 CN3.2 CN4.5 CN4.6 CN4.7 CN4.8 CN4.13 CN4.14 CN4.15 CN4.16 CN4.18 CN4.20 CN4.21 CN4.22 CN4.23 CN4.24 CN4.29 CN4.30 CN4.31 CN4.32 CN4.37 CN4.38 CN4.39 CN4.40 CN4.51 CN4.52 CN4.53 CN4.54 SW1.1 SW1.4 SW1.5 SW1.6 SW16.1 SW16.4 SW16.5 SW16.6 U1.7 U1.12 U2.5 U2.6 U2.7 U2.12 U11.7 U11.8 U11.9 U11.10 U11.11 U11.12 U11.15 U40.6 U42.22 U42.25 U42.26 U42.28 U42.29 U42.30 U42.31 U42.35 U42.36 U42.44 U42.45 U42.47 U42.48 U44.1 U44.5 U44.12 U44.13 U44.14 U44.16 USBC1.A8 USBC1.B8 | length 0.8
  Bottom Layer w0.2: CN1.4 CN1.2 ; CN1.3 CN1.1

## Polygon pours and split planes (outlines as drawn)
ESP_3V3 on Inner2 (solid, remove dead copper, pour order 0): 76.2,106.387 147.701,106.387 164.518,107.449 155.407,83.994 147.613,76.2 121.119,76.2 120.777,76.542 120.777,83.908 119.253,85.432 105.664,85.432 104.648,84.416 104.648,78.32 104.394,78.066 76.581,78.066 76.2,77.685
GND on Inner1 (solid, remove dead copper, pour order 1): 77.343,104.736 158.75,105.371 161.29,98.513 149.352,78.066 150.876,76.542 121.539,76.542 120.904,77.177 120.904,83.273 119.507,84.67 106.657,84.67 105.41,83.423 105.41,77.438 76.708,77.177 77.343,103.849

## Keep-outs
Board Outline Layer:
  lines w0.254 net "": 78.867,78.574 79.502,77.939 146.685,77.939 147.701,78.955 147.701,95.973 148.59,96.862 156.464,96.862 157.099,97.497 157.099,103.466 156.591,103.974 79.502,103.974 78.867,103.339 78.867,78.574

## Silkscreen, mask and mechanical layers (free items; w line width, h text height)
Top Silkscreen Layer:
  circle w0.2 net "": c144.867,100.974 r2.5
  text "A.C.M" at 141.888,96.925 h1.3
  text "L->M" at 141.564,88.416 h1.3
  text "POWER" at 140.653,86.35 h1.3 r90
  text "V1.0" at 106.275,83.927 h1.17
  text "+" at 136.271,83.85 h1.34
  text "LOGGING BOARD" at 105.559,82.276 h1.17
Mechanical Layer:
  circle w0.025 net "": c144.867,100.974 r1.5